# Altium PCB PCB2.PcbDoc
Units mil, origin at the board's own origin, x right, y up, seen from the top; angles counter-clockwise.
Board outline 1155 x 2625 mil, 2 copper layers (Top Layer, Bottom Layer); 21 components, 14 nets, 97 pads, 8 vias.
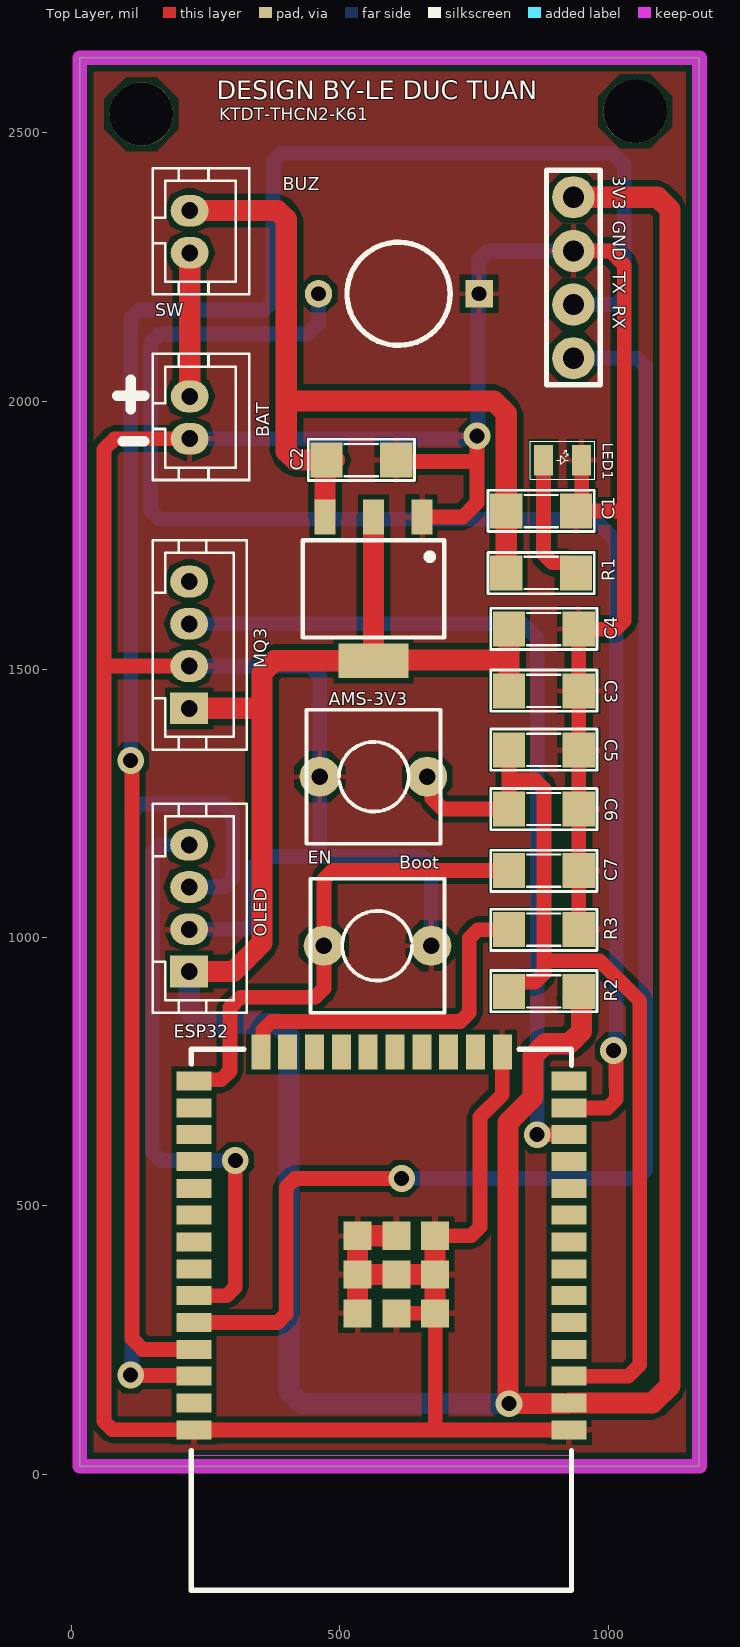
[diagram p0: Top Layer view]
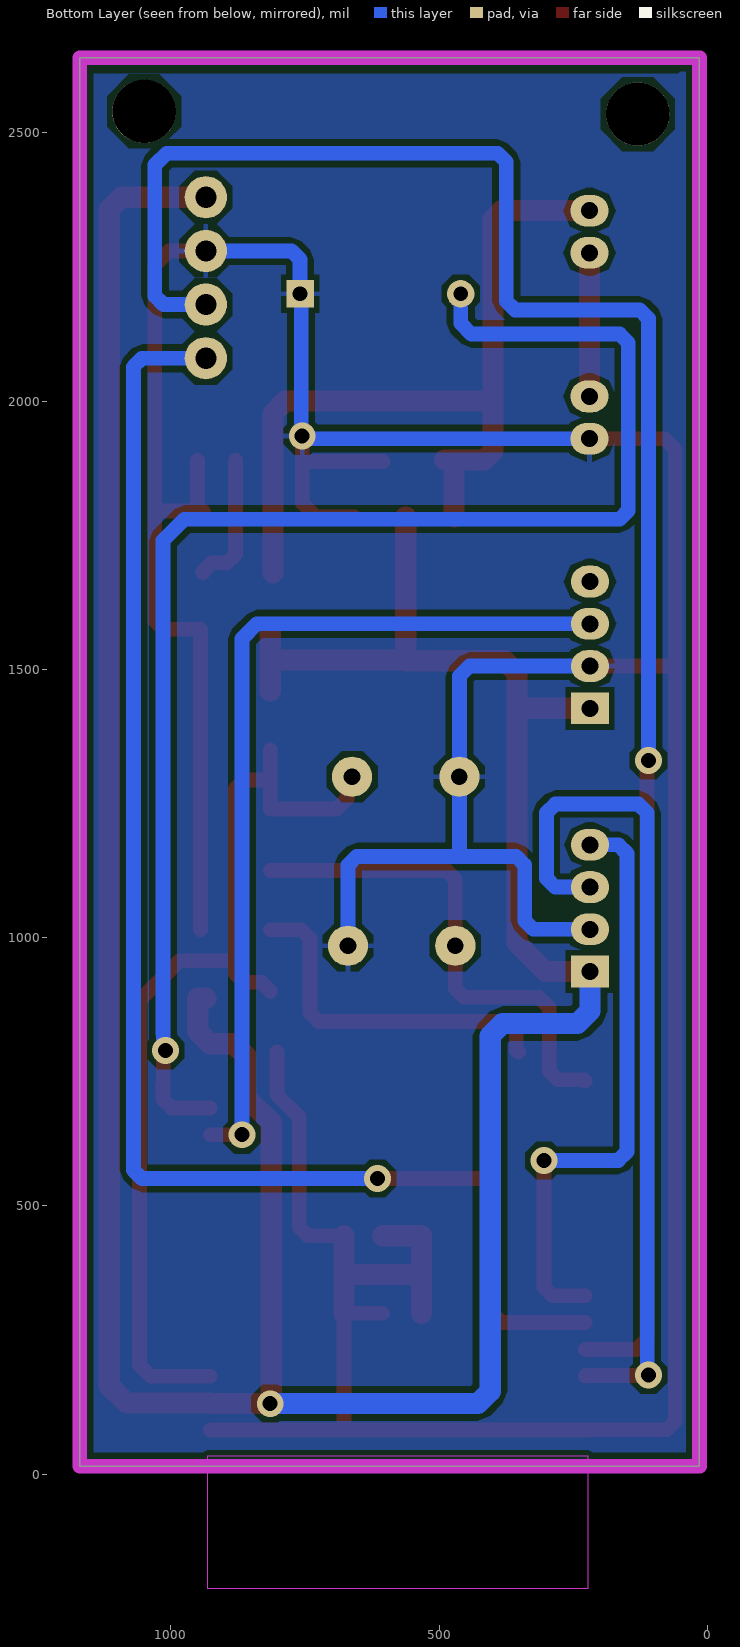
[diagram p1: Bottom Layer view, seen from below]
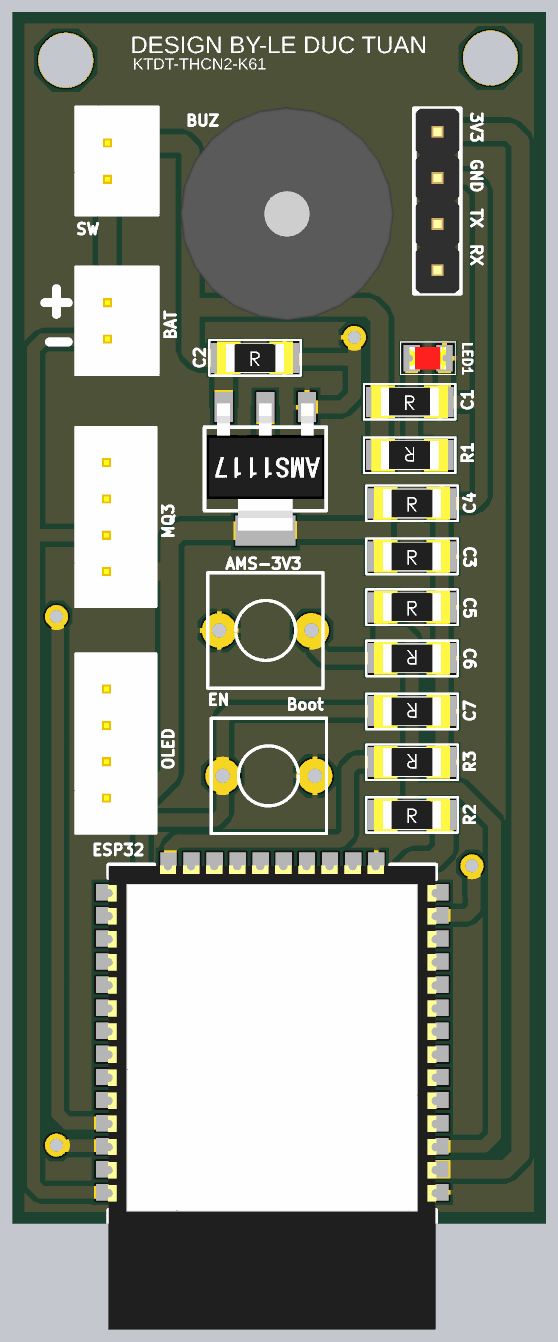
[diagram p2: 3D render of the assembled board from above, using the file's embedded part models]

## Layer stack, top to bottom
Top Solder: solder mask 0.4, Solder Resist, Dk 3.5
Top Layer: signal copper 1.4
Dielectric 1: dielectric 12.6, FR-4, Dk 4.8
Bottom Layer: signal copper 1.4
Bottom Solder: solder mask 0.4, Solder Resist, Dk 3.5

## Board outline
15,15 15,2640 1170,2640 1170,15

## Design rules (kind name [scope] priority, off if disabled: settings)
Clearance [All] p1: gap=10 ignorepadtopadclearanceinfootprint=FALSE except(0: Arc-Hole Track-Hole SMDPad-Hole THPad-Hole Via-Hole Fill-Hole Poly-Hole Region-Hole Text-Hole)
PolygonConnect [All] p1: connectstyle=Relief reliefconductorwidth=10 reliefentries=4 polygonreliefangle="90 Angle" airgapwidth=10
RoomDefinition Sheet1 [InComponentClass('Sheet1')] p1: confinementstyle=ConfineIn formatcopy=TRUE lockcomponents=FALSE outline 1205,40 7075,40 7075,1200 1205,1200
RoutingVias [All] p1: holewidth=28 width=50 viastyle="Through Hole" minholewidth=28 minwidth=50 maxholewidth=28 maxwidth=50
SolderMaskExpansion [All] p1: expansion=4 istentingtop=FALSE
Width [All] p1: maxlimit=39.37 minlimit=15.75 preferedwidth=27.56
30 further rules are at their usual default settings.

## Classes and differential pairs
component class Sheet1: "3V3  GND  TX  RX" BAT Boot BUZ C1 C2 C3 C4 C5 C6 C7 EN LED1 MQ3 OLED R1 R2 R3 SW

## Components (designator, comment, footprint, x,y, rotation, side; value= is the part's Value field where it differs from the comment)
"3V3  GND  TX  RX" "MALE-2.54-4P" MALE-2.54-4P 935,2230 r180 top (schematic designator UART)
AMS-3V3 "AMS1117" AMS1117 562.44,1650 r270 top
BAT "JST-2.00-2P" JST-2.00-2P 240,1969.37 r90 top
Boot "SW" SW2 470,985 r0 top value="SW chip 2 pin"
BUZ "coi" Buzzer 759.21,2200 r180 top
C1 "10uF" SM-1206 875,1795 r0 top value=103
C2 "100nF" SM-1206 540,1890 r0 top value=103
C3 "10uF" SM-1206 880,1460 r0 top value=103
C4 "100nF" SM-1206 880,1575 r0 top value=103
C5 "100nF" SM-1206 880,1350 r0 top value=103
C6 "100nF" SM-1206 880,1240 r180 top value=103
C7 "100nF" SM-1206 880,1125 r180 top value=103
EN "SW" SW2 662.44,1300 r180 top value="SW chip 2 pin"
ESP32 "ESP32-WROOM-32D" ESP32-WROOM-32D 577.28,434.88 r180 top
LED1 "LED_0805_RED" LED_0805_RED 915,1890 r270 top
MQ3 "JST-2.00-4P" JST-2.00-4P 239.06,1545.63 r90 top
OLED "JST-2.00-4P" JST-2.00-4P 239.06,1055 r90 top
R1 "1k" SM-1206 875,1680 r180 top value="R1/4W - 1K"
R2 "10k" SM-1206 880,900 r0 top value="R1/4W - 1K"
R3 "10k" SM-1206 880,1015 r180 top value="R1/4W - 1K"
SW "JST-2.00-2P" JST-2.00-2P 240,2315.63 r90 top

## Footprints (in the part's own frame and the unit in brackets; to place one, negate y for a bottom-side part, rotate by r counter-clockwise, add the part's x,y. Pads: shape width x height; smd on the part's side, far side on the other; paste and mask are expansions set on the pad)
AMS1117 [mm] "SOT-223"
  rect 1.65x1 smd: 1(-3.4,2.29) 2(-3.4,0) 3(-3.4,-2.29)
  rect 1.65x3.3 smd: 2(3.4,0)
  silkscreen extent -2.3,-3.35 2.3,3.35, body extent -3.6,-3.25 3.4,3.25, height 1.87
Buzzer [mm]
  rect 1.3x1.3 hole 0.7: 1(0,0)
  round 1.3 hole 0.7: 2(7.6,0)
  silkscreen extent 1.37,-2.44 6.25,2.44, body extent -2.06,-5.93 9.68,5.82, height 9.11
ESP32-WROOM-32D [mm] "Chip SMD 39 Pads 18x25.5mm w/ Antenna."
  rect 1.65x0.9 smd: 1(-8.875,8.942) 2(-8.875,7.672) 3(-8.875,6.402) 4(-8.875,5.132) 5(-8.875,3.862) 6(-8.875,2.592) 7(-8.875,1.322) 8(-8.875,0.052) 9(-8.875,-1.218) 10(-8.875,-2.488) 11(-8.875,-3.758) 12(-8.875,-5.028) 13(-8.875,-6.298) 14(-8.875,-7.568) 25(8.875,-7.568) 26(8.875,-6.298) 27(8.875,-5.028) 28(8.875,-3.758) 29(8.875,-2.488) 30(8.875,-1.218) 31(8.875,0.052) 32(8.875,1.322) 33(8.875,2.592) 34(8.875,3.862) 35(8.875,5.132) 36(8.875,6.402) 37(8.875,7.672) 38(8.875,8.942)
  rect 0.9x1.65 smd: 15(-5.72,-8.942) 16(-4.45,-8.942) 17(-3.18,-8.942) 18(-1.91,-8.942) 19(-0.64,-8.942) 20(0.63,-8.942) 21(1.9,-8.942) 22(3.17,-8.942) 23(4.44,-8.942) 24(5.71,-8.942)
  rect 1.33x1.33 smd: 39(-2.544,1.591) 39(-2.544,3.426) 39(-2.544,-0.244) 39(-0.709,-0.244) 39(-0.709,3.426) 39(-0.709,1.591) 39(1.126,3.426) 39(1.126,1.591) 39(1.126,-0.244)
  Keep-Out Layer region: -9,10.168 9,10.168 9,16.468 -9,16.468
  silkscreen extent -9,-9.07 9,16.54, body extent -9.03,-9.05 9.04,16.49, height 3
JST-2.00-2P [mm]
  oval 1.5x1.8 hole 0.8 paste-2539.97 mask+0.051: 1(-1,0.508) 2(1,0.508)
  silkscreen extent -2.95,-2.31 3.01,2.26, body extent -2.92,-2.29 2.98,2.21, height 6.1
JST-2.00-4P [mm]
  rect 1.5x1.8 hole 0.8 paste-2539.97 mask+0.102: 1(-3,0.508)
  oval 1.5x1.8 hole 0.8 paste-2539.97 mask+0.102: 2(-1,0.508) 3(1,0.508) 4(3,0.508)
  silkscreen extent -4.95,-2.21 4.95,2.23, body extent -4.95,-2.27 4.95,2.23, height 6.1
LED_0805_RED [mm]
  rect 1.45x0.9 smd: 1(0,-0.9) 2(0,0.9)
  silkscreen extent -0.89,-1.53 0.9,1.52, body extent -0.62,-1.02 0.63,0.98, height 1.1
MALE-2.54-4P [mm]
  round 2 hole 1: 1(0,-3.81) 2(0,-1.27) 3(0,1.27) 4(0,3.81)
  silkscreen extent -1.27,-5.08 1.27,5.07, body extent -1.21,-5.09 1.19,5.07, height 8.36
SM-1206 [mil] "Compoment SMD 120x60mil"
  rect 60x65 smd: 1(-65,0) 2(65,0)
  silkscreen extent -99,-38 99,39, body extent -83,-35 83,36, height 25
SW2 [mil] "SW button 2pin, 250x 250 mil"
  round 75 hole 31: 1(0,0) 2(200,0)
  silkscreen extent -25,-125 225,125

## Part data
"3V3  GND  TX  RX": "Male Header Connector 2.54mm 4 Pins.", JLCPCB PN=C492403
AMS-3V3: "IC REG LINEAR 1A SOT-89-3L", JLCPCB PN=C963410, ComponentLink1Description=Datasheet, ComponentLink1URL=http://www.advanced-monolithic.com/pdf/ds1117.pdf, Digikey PN=4518-AMS1117-3.3CT-ND
BAT SW: "Female Connector JST 2 Vias, 2.00mm.", JLCPCB PN=C5175230
Boot EN: library part SW2, "Switch button 2 pin"
BUZ: library part "COI SFM27"
C1 C2 C3 C4 C5 C6 C7: library part CM, "Cap SMD"
ESP32: "Chip SMD 39 Pads Wifi 2.4GHz BLE 4.2 18x25.5mm w/ Antenna.", JLCPCB PN=C82899, ComponentLink1Description=Datasheet, ComponentLink1URL=https://www.mouser.com/datasheet/2/891/esp32_wroom_32d_esp32_wroom_32u_datasheet_en-1365844.pdf, Digikey PN=1965-ESP32-WROOM-32D-N8CT-ND, Mouser PN=ESP32-WROOM-32D-N4
LED1: "LED 0805 Red.", JLCPCB PN=C113551
MQ3 OLED: "Female Connector JST 4 Vias, 2.00mm.", JLCPCB PN=C5175232
R1 R2 R3: library part R, "Resistor 1/4W"

## Free pads (board coordinates)
  round 118.11 hole 118.11: 2(130,2535) 3(1050,2540)

## Via types
v1: diameter 50, hole 28, Top Layer to Bottom Layer, 8 vias

## Nets (pads, with @x,y where several pads share a name; then routed paths per layer and width w, separated by ;. In a path a pad name is that pad's centre, name@x,y a point inside that pad or via, vN(x,y) a via of type N, cw(c..) or ccw(c..) an arc to the next point about the centre after c; other vN are vias at no path point)
3V3: "3V3  GND  TX  RX.1" AMS-3V3.2 C3.1 C4.1 ESP32.2 MQ3.1 OLED.1 R2.2 | length 6561.1
  Top Layer w39.37: OLED.1 301.89,936.89 355,990 355,1425 ; MQ3.1 352.48,1427.52 355,1425 ; AMS-3V3.2@562.44,1783.86 AMS-3V3.2@562.44,1516.14 ; C3.1 815,1517.5 ; C4.1 815,1517.5 ; R2.2@934.69,887.19 950,887.19 950,825.44 926.94,802.38 883.06,802.38 860,779.32 860,702.5 812.97,655.47 812.97,133.63 v1(815,131.6) 815.61,132.21 926.08,132.21 ESP32.2 1082.82,132.82 1115,165 1115,2356.94 1091.94,2380 935,2380 ; 355,1425 355,1493.08 378.06,1516.14 AMS-3V3.2@562.44,1516.14 ; AMS-3V3.2@562.44,1516.14 563.8,1517.5 815,1517.5
  Bottom Layer w39.37: OLED.1 219.06,863.06 242.12,840 381.94,840 405,816.94 405,154.66 428.06,131.6 v1(815,131.6)
COI: BUZ.2 ESP32.13 | length 2726
  Top Layer w27.56: ESP32.13 998.86,682.82 1015,698.96 1015,723.81 1014.29,724.52 1014.29,785.71 v1(1010,790)
  Bottom Layer w27.56: BUZ.2 460,2145 440,2125 163.7,2125 147.56,2108.86 147.56,1796.14 163.7,1780 975,1780 1015,1740 1015,821.17 1014.29,820.47 1014.29,794.29 v1(1010,790)
EN: C5.1 C6.2 EN.1 ESP32.3 R2.1 | length 1829.9
  Top Layer w27.56: EN.1 671.52,1290.92 671.52,1259.59 691.1,1240 C6.2 815,1293.75 ; R2.1 815,900.77 831.22,916.99 863.86,916.99 880,933.13 880,957 ; C5.1 815,1293.75 ; ESP32.3 1037.33,182.82 1058.78,204.27 1058.78,882.35 984.13,957 880,957 ; 815,1293.75 863.86,1293.75 880,1277.61 880,957
GND: "3V3  GND  TX  RX.2" AMS-3V3.1 BAT.1 Boot.2 BUZ.1 C1.2 C2.2 C3.2 C4.2 C5.2 C6.1 C7.1 EN.2 ESP32.1 ESP32.15 ESP32.38 ESP32.39 LED1.2 MQ3.2 OLED.2 R3.1 | length 8581.3
  Top Layer w27.56: MQ3.2 61.26,1506.26 60,1505 ; BAT.1 80,1930 60,1910 60,1505 ; ESP32.38 76.14,82.82 60,98.96 60,1505 ; ESP32.38@227.97,82.72 681.38,82.72 ; C2.2@605,1887.5 755.31,1887.5 ; ESP32.39@605.2,300 677.44,300 677.44,86.66 681.38,82.72 ; AMS-3V3.1@658.5,1783.86 728.86,1783.86 755.31,1810.31 755.31,1887.5 ; ESP32.39@677.44,444.49 744.61,444.49 760.76,460.63 760.76,665.76 802.48,707.48 ESP32.15 ; v1(755.31,1935) 755.31,1887.5 ; ESP32.1@926.6,82.72 681.38,82.72 ; 935,2280 1003.48,2280 1030,2253.48 1030,1795 ; R3.1 C7.1 C6.1 C5.2 C3.2 C4.2@945,1565 ; C4.2 1013.86,1575 1030,1591.14 1030,1795 ; LED1.2 950.43,1805.43 C1.2 1030,1795
  Top Layer w39.37: ESP32.39@532.95,300 ESP32.39@532.95,372.24 ; ESP32.39@605.2,444.49 532.95,444.49 ESP32.39@532.95,372.24 ; ESP32.39@677.44,300 ESP32.39@677.44,372.24 ; ESP32.39@677.44,444.49 ESP32.39@677.44,372.24 ; ESP32.39@532.95,372.24 605.2,372.24 ESP32.39@677.44,372.24
  Bottom Layer w27.56: OLED.2 324.49,1015.63 340.63,1031.77 340.63,1135.3 356.77,1151.44 462.44,1151.44 ; MQ3.2 443.74,1506.26 462.44,1487.56 EN.2 462.44,1151.44 ; BAT.1 734.24,1930 734.95,1930.71 751.02,1930.71 v1(755.31,1935) ; Boot.2 670,1135.3 653.86,1151.44 462.44,1151.44 ; v1@759.21,1940.79 757.26,1942.74 757.26,2198.05 BUZ.1 759.21,2263.86 775.36,2280 935,2280
IO0: Boot.1 C7.2 ESP32.25 | length 938.2
  Top Layer w27.56: ESP32.25 230.43,735.37 278.86,735.37 295,751.52 295,870 314.15,889.15 453.86,889.15 470,905.3 470,1108.86 486.14,1125 C7.2
MQ3: ESP32.12 MQ3.3 | length 1643.6
  Top Layer w27.56: v1(867.65,632.82) ESP32.12
  Bottom Layer w27.56: MQ3.3 840,1585 867.65,1557.35 v1(867.65,632.82)
NetBAT_2: BAT.2 SW.1 | length 267.5
  Top Layer w39.37: BAT.2 SW.1
NetESP32_24: ESP32.24 R3.2 | length 659.9
  Top Layer w27.56: ESP32.24 356.42,790.88 356.42,827.86 372.56,844 724.86,844 741,860.14 741,998.86 757.14,1015 R3.2
NetLED1_1: LED1.1 R1.1 | length 251.5
  Top Layer w27.56: LED1.1 879.57,1714.86 895.71,1698.72 923.78,1698.72 940,1682.5 R1.1
RX: "3V3  GND  TX  RX.4" ESP32.34 | length 2736.5
  Top Layer w27.56: ESP32.34 383.86,282.82 400,298.96 400,534.86 416.14,551 v1(615,551)
  Bottom Layer w27.56: v1(615,551) 1053.86,551 1070,567.14 1070,2063.86 1053.86,2080 935,2080
SCL: ESP32.36 OLED.3 | length 1578.6
  Top Layer w27.56: v1(110,185) 111.09,183.91 226.78,183.91 ESP32.36
  Bottom Layer w27.56: v1(110,185) 112.44,187.44 112.44,1232.86 128.58,1249 283.86,1249 300,1232.86 300,1110.51 283.86,1094.37 OLED.3
SDA: ESP32.33 OLED.4 | length 1113.1
  Top Layer w27.56: ESP32.33 288.86,332.82 305,348.96 v1(305,585)
  Bottom Layer w27.56: OLED.4 166.14,1173.11 150,1156.97 150,601.14 166.14,585 v1(305,585)
TX: "3V3  GND  TX  RX.3" ESP32.35 | length 3580.3
  Top Layer w27.56: v1(110,1330) 112.56,1327.44 112.56,252.44 132.18,232.82 ESP32.35
  Bottom Layer w27.56: v1(110,1330) 110,2153.86 126.14,2170 358.86,2170 375,2186.14 375,2445.86 391.14,2462 1008,2462 1030,2440 1030,2196.14 1013.86,2180 935,2180
VIN: AMS-3V3.3 C1.1 C2.1 R1.2 SW.2 | length 1538.8
  Top Layer w39.37: SW.2 383.86,2355 400,2338.86 400,1995 ; AMS-3V3.3 C2.1@472.28,1888 ; C2.1@490,1890 416.14,1890 400,1906.14 400,1995 ; R1.2 C1.1 810,1976.94 786.94,2000 405,2000 400,1995
pads on no net: ESP32.4 ESP32.5 ESP32.6 ESP32.7 ESP32.8 ESP32.9 ESP32.10 ESP32.11 ESP32.14 ESP32.16 ESP32.17 ESP32.18 ESP32.19 ESP32.20 ESP32.21 ESP32.22 ESP32.23 ESP32.26 ESP32.27 ESP32.28 ESP32.29 ESP32.30 ESP32.31 ESP32.32 ESP32.37 MQ3.4

## Polygon pours and split planes (outlines as drawn)
GND on Top Layer "GND_L01_P000" (solid, pour order 0): 25,2625 30,2630 1160,2630 1160,30 1150,20 20,20
GND on Bottom Layer "GND_L02_P002" (solid, pour order 2): 40,2625 55,2610 1165,2610 1165,35 1145,15 25,15

## Keep-outs
Keep-Out Layer:
  the board outline again, w27.56

## Silkscreen, mask and mechanical layers (free items; w line width, h text height)
Top Overlay:
  lines w19.68: 85,2010 135,2010 ; 95,1925 135,1925 ; 110,1985 110,2040
  text "DESIGN BY-LE DUC TUAN" at 270,2550.66 h59.06
  text "KTDT-THCN2-K61" at 275,2515.44 h39.37